# Altium PCB WX0.000.863.PcbDoc (part 3 of 4)
Units mil, origin at the board's own origin, x right, y up, seen from the top; angles counter-clockwise.
Board outline 6000 x 4000 mil, 2 copper layers (Top Layer, Bottom Layer); 210 components, 152 nets, 629 pads, 401 vias.
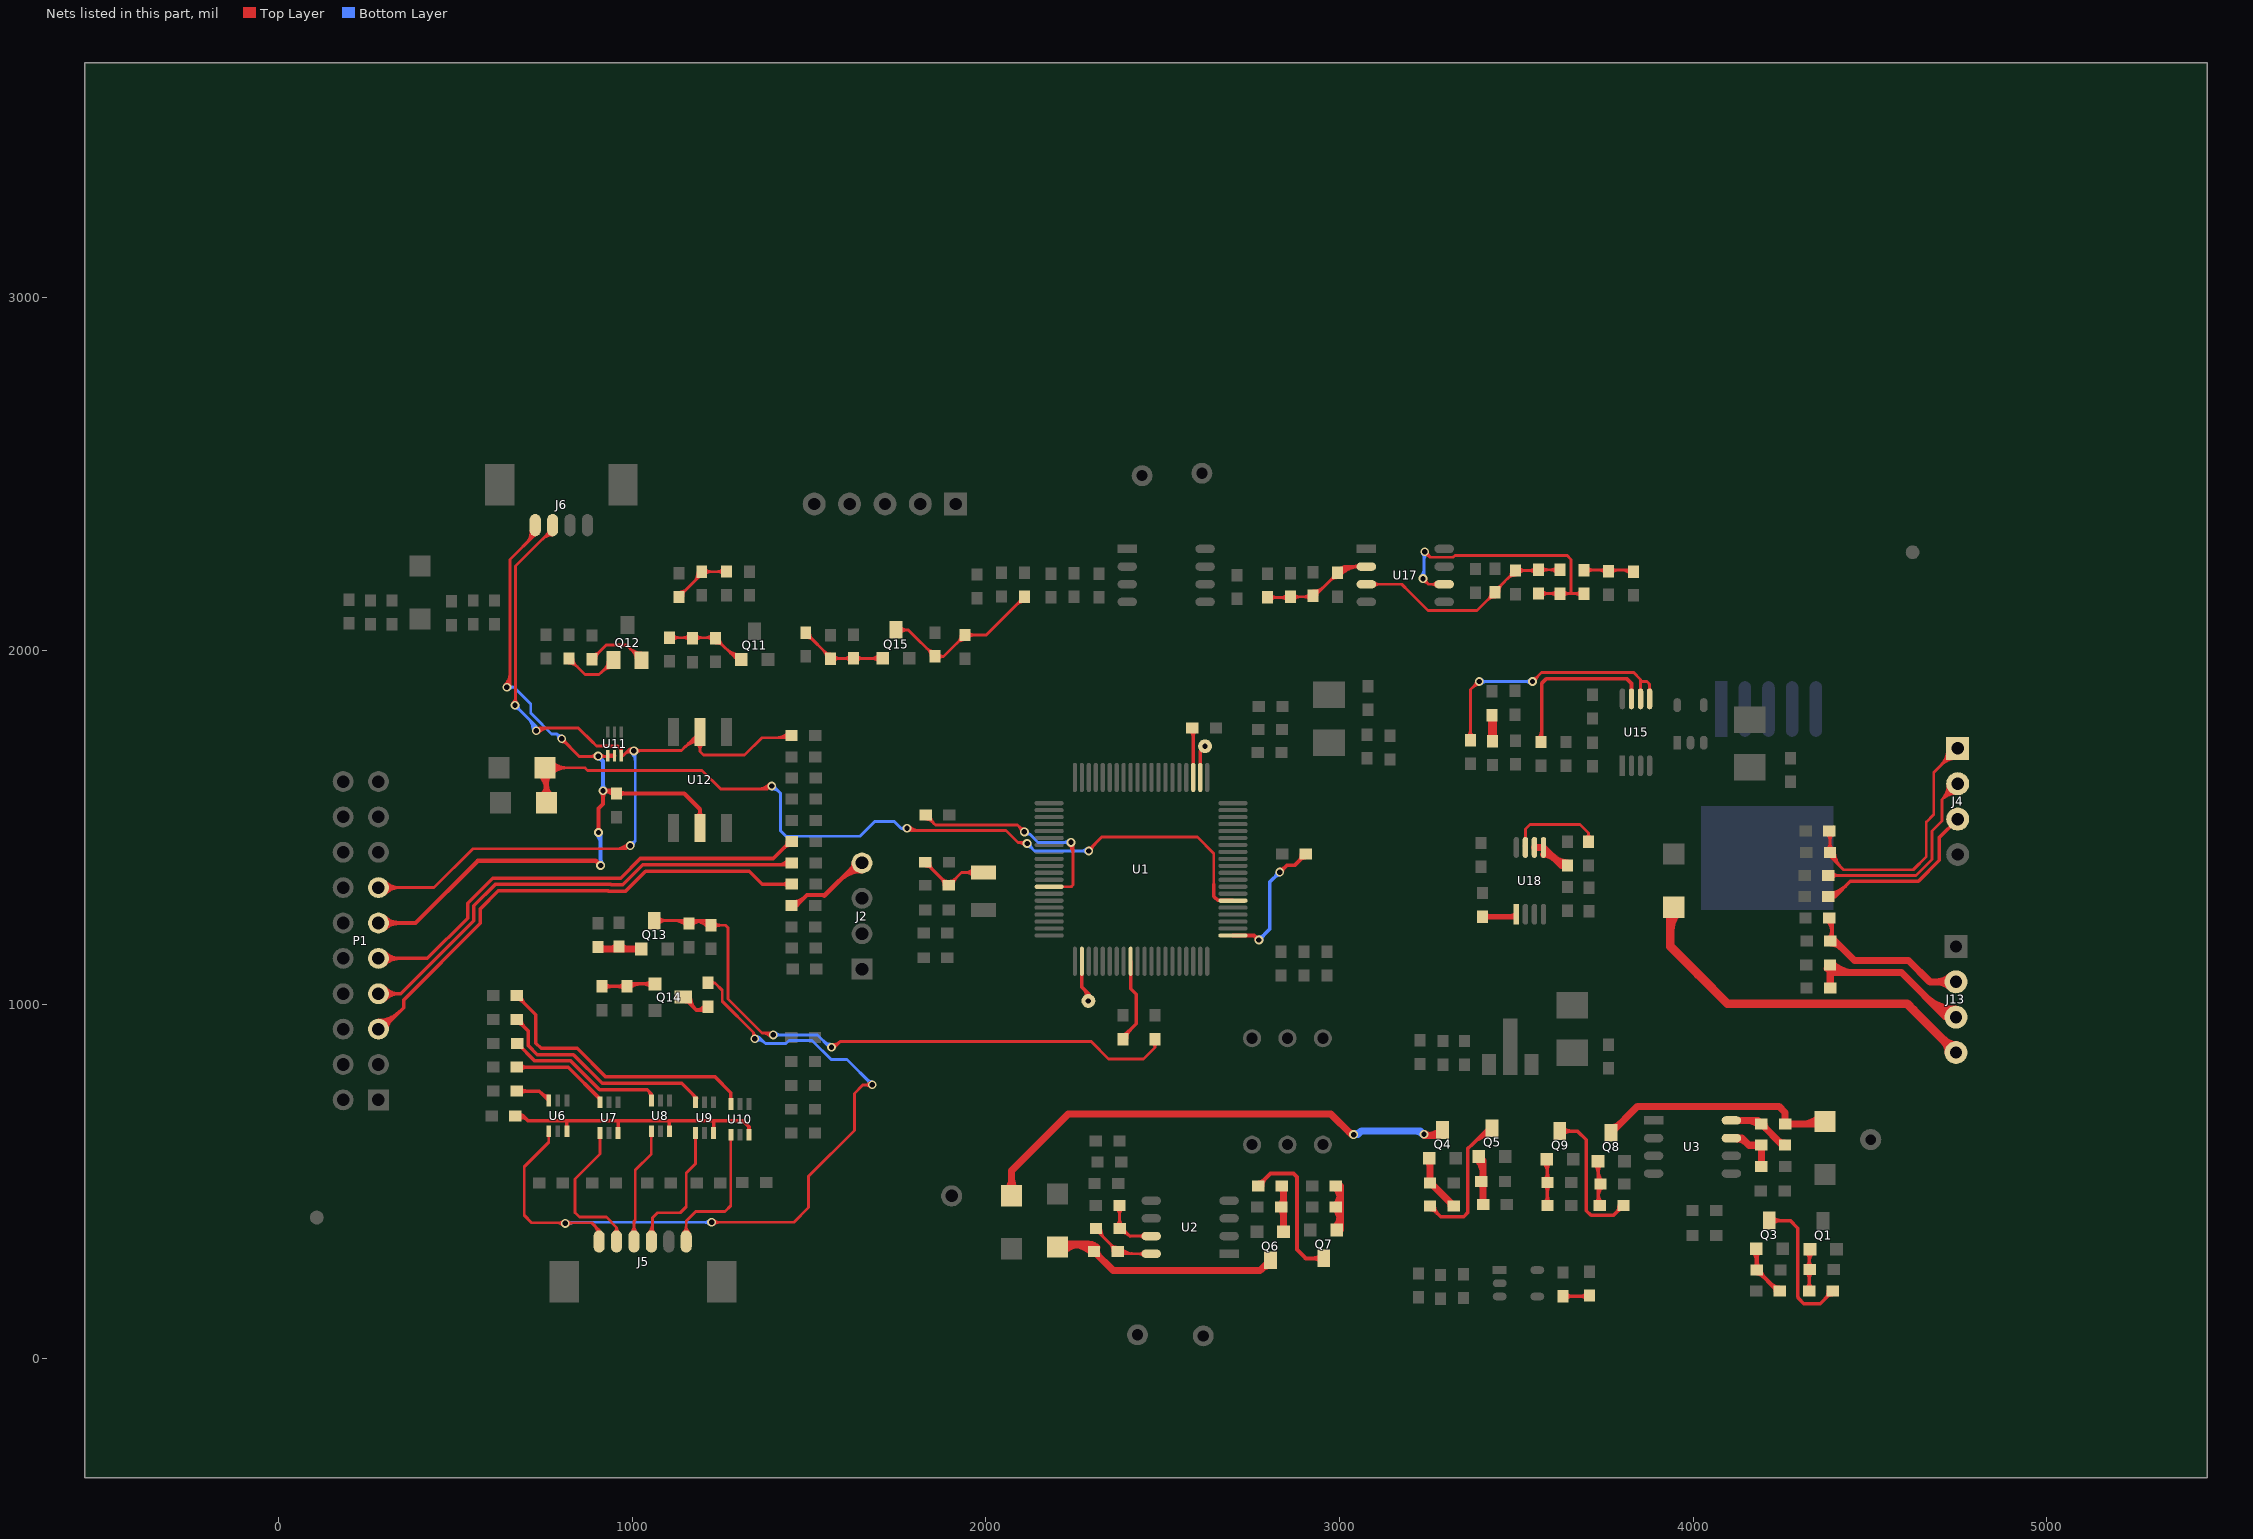
[diagram p3: the nets of this part, all layers, seen from the top]

## Via types
v1: diameter 25, hole 15, Top Layer to Bottom Layer, tented both sides, 401 vias

## Nets (pads, with @x,y where several pads share a name; then routed paths per layer and width w, separated by ;. In a path a pad name is that pad's centre, name@x,y a point inside that pad or via, vN(x,y) a via of type N, cw(c..) or ccw(c..) an arc to the next point about the centre after c; other vN are vias at no path point) (continued)
MOTO_INT: D1.1 D2.1 U1.46 | length 3114.1
  Top Layer w8: D1.1@754,1669 866.9,1669 874,1661.9 1197.44,1661.9 1250.54,1608.8 1382.8,1608.8 1394,1620 1394.81,1619.19 v1(1394.81,1617.81) ; D1.1@766.73,1656.27 cw(c797.46,1625.54) 797.46,1669 cw(c797.46,1712.46) D1.1@766.73,1681.73 ; D1.1@772.38,1650.62 cw(c816.77,1606.23) 816.77,1669 cw(c816.77,1731.77) D1.1@772.38,1687.38 ; 1352.54,1608.8 ccw(c1352.54,1660.07) v1@1388.8,1623.82 ; 1371.86,1608.8 ccw(c1371.86,1640.76) v1@1394.45,1618.16 ; v1(1777,1498) 1783.2,1491.8 2057.2,1491.8 2091,1458 ; v1@1777.35,1498.35 ccw(c1793.18,1514.18) 1793.18,1491.8 ; v1@1783.01,1504.01 ccw(c1812.49,1533.49) 1812.49,1491.8 ; 2103.72,1458 ccw(c2103.72,1468.28) v1@2110.99,1461.01 ; v1@2110.71,1449.28 ccw(c2091,1431.36) 2091,1458 ; v1(2117,1455) 2117,1456 2115,1458 2091,1458 ; v1(2291,1434) 2291,1436 2328,1473 2598.6,1473 2644.69,1426.91 2644.69,1340 ; v1@2291,1442.5 ccw(c2291,1458.19) 2302.1,1447.1 ; v1@2299.5,1434 cw(c2324.85,1434) 2306.92,1451.92
  Top Layer w10: 2644.69,1340 2644.69,1305.35 2655.65,1294.4 2697.85,1294.4 U1.46@2698.83,1293.42 ; 2650.29,1299.75 ccw(c2663.39,1312.85) U1.46@2663.39,1294.32
  Top Layer w12: D1.1@737.03,1652.03 cw(c686.4,1601.4) 758,1601.4 ; D2.1@741.03,1586.97 ccw(c700.06,1627.94) 758,1627.94 ccw(c815.94,1627.94) D2.1@774.97,1586.97 ; D1.1@745.51,1660.51 cw(c715.37,1630.37) 758,1630.37 ; D1.1@754,1669 758,1665 D2.1@758,1570 ; 758,1620.72 cw(c802.28,1620.72) D1.1@770.97,1652.03
  Bottom Layer w8: v1@1394.81,1609.31 cw(c1394.81,1578.2) 1416.8,1600.2 ; v1(1394.81,1617.81) 1396,1619 1398,1619 1419.3,1597.7 1419.3,1491.04 1434.74,1475.6 1644.26,1475.6 1685.96,1517.3 1741.07,1517.3 1760.37,1498 ; v1@1403.31,1617.81 ccw(c1413.24,1617.81) 1406.22,1610.78 ; v1@1770.11,1493.02 ccw(c1760.37,1485.97) 1760.37,1498 ; v1@1770.11,1502.98 cw(c1760.37,1510.03) 1760.37,1498 ; v1(1777,1498) 1760.37,1498 ; v1@2117,1446.5 cw(c2117,1425.98) 2131.51,1440.49 cw(c2146.02,1455) v1@2125.5,1455 ; v1@2284.99,1427.99 ccw(c2270.48,1413.48) 2270.48,1434 ccw(c2270.48,1454.52) v1@2284.99,1440.01 ; v1(2291,1434) 2138,1434 v1@2118.5,1453.5 ; v1@2118.5,1453.5 2117,1452 v1(2117,1455) v1@2118.5,1453.5
NetC3_1: C3.1 R34.1 U2.7 | length 340.5
  Top Layer w8: R34.1@2369.85,423.87 cw(c2350.22,404.24) 2377.98,404.24 cw(c2405.75,404.24) R34.1@2386.12,423.87 ; C3.1@2370.34,375.13 ccw(c2351.9,393.58) 2377.98,393.58 ; 2377.98,395.95 ccw(c2407.42,395.95) C3.1@2386.61,375.13 ; R34.1@2377.98,432 2377.98,367 2385,367 2407,345 U2.7@2467.98,345 ; C3.1@2380.48,355.5 cw(c2380.48,316.81) 2407.83,344.17 ; C3.1@2380.48,363.5 cw(c2380.48,344.13) C3.1@2394.17,357.83 ; C3.1@2391.98,367 ccw(c2408.82,367) 2396.91,355.09 ; U2.7@2446.77,339.34 ccw(c2433.11,325.69) 2433.11,345 ccw(c2433.11,364.31) U2.7@2446.77,350.66
NetC3_2: C3.2 R41.1 U2.8 | length 389.2
  Top Layer w8: C3.2@2310.98,367 2310.98,364 R41.1@2372.98,302 2379.98,295 U2.8@2467.98,295 ; C3.2@2313.48,355.5 cw(c2313.48,340.99) 2323.73,351.25 ; C3.2@2316.98,367 ccw(c2338.68,367) C3.2@2323.33,351.65 ; C3.2@2324.98,367 ccw(c2366,367) 2336.99,337.99 ; 2349.94,325.05 cw(c2326.89,302) R41.1@2359.48,302 ; 2354.77,320.22 ccw(c2370.98,336.43) R41.1@2370.98,313.5 ; R41.1@2377.46,304.47 ccw(c2400.33,327.35) 2400.33,295 ; R41.1@2383.12,310.13 ccw(c2419.65,346.66) 2419.65,295 ; U2.8@2446.77,289.34 ccw(c2433.11,275.69) 2433.11,295 ccw(c2433.11,314.31) U2.8@2446.77,300.66
NetC5_2: C5.2 R43.1 Y1.2 | length 397.3
  Top Layer w8: R43.1@1828.98,1402 1893.98,1337 C5.2@1895.49,1337 1931.79,1373.3 Y1.2@1993.98,1373.3 ; R43.1@1830.98,1390.5 cw(c1830.98,1367.57) 1847.2,1383.78 ; R43.1@1842.48,1402 ccw(c1875.08,1402) 1852.03,1378.95 ; 1873.51,1357.47 cw(c1853.04,1337) C5.2@1881.99,1337 ; 1874.7,1356.28 ccw(c1893.49,1375.08) C5.2@1893.49,1348.5 ; C5.2@1897.49,1348.5 ccw(c1897.49,1371.43) 1913.71,1355.22 ; C5.2@1908.99,1337 cw(c1941.59,1337) 1918.54,1360.05 ; Y1.2@1967.15,1362.21 ccw(c1940.37,1335.43) 1940.37,1373.3 ccw(c1940.37,1411.17) Y1.2@1967.15,1384.39
NetC9_1: C9.1 R49.1 U3.7 | length 207.3
  Top Layer w20: U3.7@4107.98,622 4137.98,622 4157.98,602 4192.98,602 R49.1@4192.98,542 ; U3.7@4123.54,620 cw(c4123.54,580.31) 4151.61,608.37 ; U3.7@4124.12,620.08 cw(c4130.23,599.8) 4145.2,614.78
NetC9_2: C9.2 R52.1 U3.8 | length 251.4
  Top Layer w20: U3.8@4107.98,672 4182.98,672 R52.1@4192.98,662 4252.98,602 C9.2@4259.98,602 ; 4153.56,672 cw(c4153.56,624.58) R52.1@4187.1,658.11 ; R52.1@4200.48,662 ccw(c4218.59,662) R52.1@4205.79,649.2 ; 4240.41,614.58 ccw(c4257.49,631.66) C9.2@4257.49,607.5
NetC21_2: C21.2 Q13.B R1.1 | length 223.1
  Top Layer w20: C21.2@903,1162.49 908.49,1157 Q13.B@1025.98,1157 ; C21.2@906.89,1164.38 ccw(c924.71,1182.2) 924.71,1157 ; 937.65,1157 ccw(c937.65,1187.35) R1.1@959.11,1165.89 ; R1.1@966.89,1165.89 ccw(c988.35,1187.35) 988.35,1157 ; Q13.B@1020.33,1151.34 ccw(c1006.67,1137.69) 1006.67,1157 ccw(c1006.67,1176.31) Q13.B@1020.33,1162.66
NetC32_2: C32.2 J13.2 R66.1 | length 676.1
  Top Layer w10: C32.2@4379.08,1236.58 cw(c4346.67,1204.17) 4392.51,1204.17 ; R66.1@4382.58,1186.42 ccw(c4358.59,1210.41) 4392.51,1210.41 ; C32.2@4386.16,1243.65 cw(c4370.82,1228.31) 4392.51,1228.31 ; R66.1@4392.51,1187.49 C32.2@4392.51,1252.49 ; 4392.51,1198.29 ccw(c4409.29,1198.29) R66.1@4397.42,1186.42
  Top Layer w20: R66.1@4390,1173.5 cw(c4390,1133.67) 4418.17,1161.83 ; R66.1@4392.51,1187.49 4456,1124 4609,1124 4669,1064 J13.2@4743,1064 ; J13.2@4727.09,1048.09 ccw(c4688.68,1009.68) 4688.68,1064 ccw(c4688.68,1118.32) J13.2@4727.09,1079.91
NetC33_1: C33.1 J13.3 R68.1 | length 725.1
  Top Layer w8: C33.1@4387,1047.49 C33.1@4387.49,1047
  Top Layer w20: R68.1@4378.75,1101.75 ccw(c4407.11,1130.11) 4407.11,1090 ; R68.1@4387,1112 4387.49,1111.51 C33.1@4387.49,1047 ; 4390.49,1090 4589,1090 4715,964 J13.3@4743,964 ; R68.1@4392.89,1115.89 ccw(c4455.39,1178.39) 4455.39,1090 ; 4656.79,1022.21 ccw(c4743,1108.42) J13.3@4743,986.5 ; 4690.93,988.07 ccw(c4743,1040.13) J13.3@4743,966.5
NetC36_2: C36.2 R70.1 R87.2 | length 358.3
  Top Layer w8: R70.1@1132,2152 1197,2217 C36.2@1197,2223.51 1266.51,2223.51 R87.2@1267,2224 ; R70.1@1132,2165.5 ccw(c1132,2198.09) 1155.05,2175.05 ; R70.1@1143.5,2154 cw(c1166.43,2154) 1150.22,2170.22 ; 1174.18,2194.18 ccw(c1146.85,2221.51) C36.2@1185.5,2221.51 ; 1185.07,2205.07 cw(c1197,2193.13) C36.2@1197,2210.01 ; C36.2@1187.84,2207.84 ccw(c1174.16,2221.51) C36.2@1193.5,2221.51 ; C36.2@1205.13,2215.38 cw(c1224.76,2195.75) 1224.76,2223.51 cw(c1224.76,2251.27) C36.2@1205.13,2231.64 ; 1238.05,2223.51 ccw(c1238.05,2252.95) R87.2@1258.87,2232.13 ; 1240.42,2223.51 cw(c1240.42,2197.42) R87.2@1258.87,2215.87
NetC38_1: C38.1 Q11.B R101.2 R103.1 | length 552
  Top Layer w8: R101.2@1106,2037 1234.49,2037 C38.1@1236,2035.49 1296.49,1975 Q11.B@1309,1975 ; R101.2@1114.13,2028.87 cw(c1133.76,2009.24) 1133.76,2037 cw(c1133.76,2064.76) R101.2@1114.13,2045.13 ; R103.1@1162.87,2028.87 ccw(c1143.24,2009.24) 1143.24,2037 ccw(c1143.24,2064.76) R103.1@1162.87,2045.13 ; R103.1@1179.13,2028.87 cw(c1198.76,2009.24) 1198.76,2037 cw(c1198.76,2064.76) R103.1@1179.13,2045.13 ; 1207.05,2037 ccw(c1207.05,2066.44) C38.1@1227.87,2045.62 ; 1209.42,2037 cw(c1209.42,2010.91) C38.1@1227.87,2029.36 ; C38.1@1236,2021.99 cw(c1236,1989.4) 1259.05,2012.45 ; C38.1@1247.5,2033.49 ccw(c1270.43,2033.49) 1254.22,2017.27 ; 1263.75,2007.74 ccw(c1309,2053) Q11.B@1309,1989 ; 1277.4,1994.09 ccw(c1309,2025.68) Q11.B@1309,1981 ; Q11.B@1291.06,1980.43 ccw(c1309,1998.37) Q11.B@1309,1973
NetC39_1: C39.1 Q15.C R105.1 R110.1 | length 728.3
  Top Layer w8: Q15.C@1746,2059 1781,2059 R105.1@1856,1984 1880.51,1984 ; Q15.C@1755.9,2049.1 cw(c1779.8,2025.2) 1779.8,2059 cw(c1779.8,2092.8) Q15.C@1755.9,2068.9 ; 1832.95,2007.05 ccw(c1856,2030.09) R105.1@1856,1997.5 ; 1837.78,2002.22 cw(c1821.57,1986) R105.1@1844.5,1986 ; R105.1@1864.84,1976.65 cw(c1880.51,1963.64) 1880.51,1984 ; R105.1@1864.84,1991.35 ccw(c1880.51,2004.36) 1880.51,1984 ; 1917.95,2021.45 cw(c1941,1998.4) C39.1@1941,2030.99 ; 1922.78,2026.27 ccw(c1906.57,2042.49) C39.1@1929.5,2042.49 ; C39.1@1949.13,2036.36 cw(c1968.76,2016.73) 1968.76,2044.49 cw(c1968.76,2072.25) C39.1@1949.13,2052.62 ; 2086.95,2129.95 cw(c2110,2106.91) R110.1@2110,2139.5 ; 2091.78,2134.78 ccw(c2075.57,2151) R110.1@2098.5,2151 ; R110.1@2110,2153 2001.49,2044.49 C39.1@1941,2044.49 1880.51,1984
NetC40_1: C40.1 Q15.B R106.2 R107.2 | length 523
  Top Layer w8: R106.2@1491,2037.5 cw(c1491,2004.91) 1514.05,2027.95 ; R106.2@1491,2051 1561,1981 R107.2@1561,1977 1562.51,1978.51 C40.1@1626,1978.51 1708.51,1978.51 Q15.B@1709,1979 ; R106.2@1502.5,2049 ccw(c1525.43,2049) 1509.22,2032.78 ; 1539.95,2002.05 cw(c1516.91,1979) R107.2@1549.5,1979 ; 1544.78,1997.22 ccw(c1561,2013.43) R107.2@1561,1990.5 ; R107.2@1569.13,1970.87 cw(c1587.58,1952.42) 1587.58,1978.51 ; R107.2@1569.13,1987.13 ccw(c1589.95,2007.95) 1589.95,1978.51 ; C40.1@1617.87,1970.38 ccw(c1598.24,1950.75) 1598.24,1978.51 ccw(c1598.24,2006.27) C40.1@1617.87,1986.64 ; C40.1@1634.13,1970.38 cw(c1653.76,1950.75) 1653.76,1978.51 cw(c1653.76,2006.27) C40.1@1634.13,1986.64 ; 1674.02,1978.51 ccw(c1674.02,2013.98) Q15.B@1699.1,1988.9 ; 1676.39,1978.51 cw(c1676.39,1946.39) Q15.B@1699.1,1969.1
NetC43_1: C43.1 R111.1 R112.1 R114.2 U17.2 | length 821.2
  Top Layer w8: R114.2@2796,2151 2859.49,2151 C43.1@2861,2152.51 R111.1@2925,2152.51 ; R114.2@2804.13,2142.87 cw(c2823.76,2123.24) 2823.76,2151 cw(c2823.76,2178.76) R114.2@2804.13,2159.13 ; 2832.05,2151 cw(c2832.05,2121.56) C43.1@2852.87,2142.38 ; 2834.42,2151 ccw(c2834.42,2177.09) C43.1@2852.87,2158.64 ; C43.1@2869.13,2144.38 cw(c2888.76,2124.75) 2888.76,2152.51 cw(c2888.76,2180.27) C43.1@2869.13,2160.64 ; 2896.05,2152.51 ccw(c2896.05,2181.95) R111.1@2916.87,2161.13 ; 2898.42,2152.51 cw(c2898.42,2126.42) R111.1@2916.87,2144.87 ; R111.1@2925,2155 2930,2155 R112.1@2995,2220 3014,2239 ; R111.1@2925,2160.5 ccw(c2925,2185.85) 2942.92,2167.92 ; R111.1@2925,2168.5 ccw(c2925,2213.16) 2956.58,2181.58 ; R111.1@2936.5,2157 cw(c2947.36,2157) R111.1@2939.68,2164.68 ; 2971.95,2196.95 cw(c2995,2173.91) R112.1@2995,2206.5 ; 2976.78,2201.78 ccw(c2960.57,2218) R112.1@2983.5,2218 ; R112.1@2991.82,2225.18 cw(c3025.18,2191.82) 3025.18,2239 ; R112.1@2996.76,2233.36 ccw(c2999.83,2253.17) 3014,2239 ; R112.1@2997.47,2219.53 cw(c3044.49,2172.51) 3044.49,2239 ; R112.1@3003.13,2213.87 cw(c3063.81,2153.19) U17.2@3063.81,2239 ; R112.1@3006.5,2222 cw(c3029.44,2222) 3013.22,2238.22 ; 3038.71,2239 cw(c3038.71,2216.27) U17.2@3054.78,2232.34 ; 3043.54,2239 ccw(c3043.54,2254.9) U17.2@3054.78,2243.66 ; U17.2@3076,2238 3075.42,2238 3074.42,2239 3014,2239
NetC45_1: C45.1 R116.2 R118.1 U17.6 | length 1131.6
  Top Layer w8: v1@3236,2195.5 cw(c3236,2174.98) 3250.51,2189.49 cw(c3265.02,2204) v1@3244.5,2204 ; v1(3236,2204) 3252,2188 3257,2188 U17.6@3296,2188 ; v1@3241,2271.5 cw(c3241,2250.98) 3255.51,2265.49 cw(c3270.02,2280) v1@3249.5,2280 ; v1(3241,2280) 3256.8,2264.2 3321.42,2264.2 3326.22,2269 3644,2269 3655,2258 3655,2161.51 ; U17.6@3274.78,2182.34 ccw(c3261.13,2168.69) 3261.13,2188 ccw(c3261.13,2207.31) U17.6@3274.78,2193.66 ; R118.1@3563,2162 3622.51,2162 C45.1@3623,2161.51 3655,2161.51 ; R118.1@3571.13,2153.87 cw(c3590.76,2134.24) 3590.76,2162 cw(c3590.76,2189.76) R118.1@3571.13,2170.13 ; 3594.05,2162 cw(c3594.05,2132.56) C45.1@3614.87,2153.38 ; 3596.42,2162 ccw(c3596.42,2188.09) C45.1@3614.87,2169.64 ; C45.1@3631.13,2153.38 cw(c3650.76,2133.75) 3650.76,2161.51 cw(c3650.76,2189.27) C45.1@3631.13,2169.64 ; 3662.01,2161.51 cw(c3662.01,2132.01) R116.2@3682.87,2152.87 ; 3664.47,2161.51 ccw(c3664.47,2187.53) R116.2@3682.87,2169.13 ; R116.2@3691,2161 3690.49,2161.51 3655,2161.51
  Bottom Layer w8: v1@3229.99,2210.01 ccw(c3208.24,2231.76) 3239,2231.76 ; v1@3234.99,2273.99 cw(c3225.31,2264.31) 3239,2264.31 ; v1(3236,2204) 3239,2207 3239,2280 v1(3241,2280) ; 3239,2217.28 ccw(c3249.28,2217.28) v1@3242.01,2210.01 ; 3239,2254.65 cw(c3266.35,2254.65) v1@3247.01,2273.99
NetC45_2: C45.2 R115.1 R117.1 R118.2 U17.3 | length 966.6
  Top Layer w8: U17.3@3076,2188 3176,2188 3198.12,2165.88 3202.2,2161.8 3250,2114 3389,2114 R115.1@3440,2165 R115.1@3435.71,2165 ; U17.3@3097.22,2182.34 cw(c3110.87,2168.69) 3110.87,2188 cw(c3110.87,2207.31) U17.3@3097.22,2193.66 ; 3416.95,2141.95 cw(c3440,2118.91) R115.1@3440,2151.5 ; 3421.78,2146.78 ccw(c3405.57,2163) R115.1@3428.5,2163 ; R115.1@3438,2167 R117.1@3498,2227 3561,2227 R118.2@3563,2229 3622.51,2229 C45.2@3623,2228.51 ; R115.1@3440,2178.5 ccw(c3440,2201.43) 3456.22,2185.22 ; R115.1@3451.5,2167 cw(c3484.09,2167) 3461.05,2190.05 ; 3474.95,2203.95 cw(c3498,2180.91) R117.1@3498,2213.5 ; 3479.78,2208.78 ccw(c3463.57,2225) R117.1@3486.5,2225 ; R117.1@3506.13,2218.87 cw(c3525.76,2199.24) 3525.76,2227 cw(c3525.76,2254.76) R117.1@3506.13,2235.13 ; R118.2@3554.87,2218.87 ccw(c3535.24,2199.24) 3535.24,2227 ccw(c3535.24,2254.76) R118.2@3554.87,2235.13 ; R118.2@3571.13,2220.87 cw(c3590.76,2201.24) 3590.76,2229 cw(c3590.76,2256.76) R118.2@3571.13,2237.13 ; 3594.05,2229 cw(c3594.05,2199.56) C45.2@3614.87,2220.38 ; 3596.42,2229 ccw(c3596.42,2255.09) C45.2@3614.87,2236.64
NetC46_1: C46.1 R113.2 R116.1 | length 316.3
  Top Layer w8: R116.1@3691,2228 3826.49,2228 C46.1@3831,2223.49 ; R116.1@3699.13,2219.87 cw(c3718.76,2200.24) 3718.76,2228 cw(c3718.76,2255.76) R116.1@3699.13,2236.13 ; 3730.82,2228 cw(c3730.82,2196.82) R113.2@3752.87,2218.87 ; 3735.65,2228 ccw(c3735.65,2252.35) R113.2@3752.87,2235.13 ; R113.2@3769.13,2218.87 cw(c3791.18,2196.82) 3791.18,2228 ; R113.2@3769.13,2235.13 ccw(c3786.35,2252.35) 3786.35,2228 ; 3797.18,2228 cw(c3797.18,2191.67) C46.1@3822.87,2217.36 ; 3809.29,2228 ccw(c3809.29,2247.2) C46.1@3822.87,2233.62
NetF1_1: F1.1 J13.4 | length 1179.1
  Top Layer w25: 3935,1208.61 cw(c4011.39,1208.61) F1.1@3957.37,1262.63 ; F1.1@3935,1275 3935,1164 4014,1085 4097,1002 4605,1002 4623,984 J13.4@4743,864 ; J13.4@4723,864 ccw(c4674.72,864) 4708.86,898.14 ccw(c4743,932.28) J13.4@4743,884
NetJ2_4: J2.4 R45.2 | length 450.3
  Top Layer w12: R45.2@1450.78,1280 1465.26,1280 1494.56,1309.3 1541,1309.3 1543.15,1307.15 1629,1393 J2.4@1657,1393 ; R45.2@1452.78,1276.77 ccw(c1452.78,1299.12) 1468.58,1283.32 ; R45.2@1452.78,1288.77 ccw(c1452.78,1340.09) 1489.07,1303.8 ; 1585.94,1349.94 cw(c1650,1285.87) J2.4@1650,1376.47 ; 1606.42,1370.42 cw(c1650,1326.84) J2.4@1650,1388.47 ; 1619.74,1383.74 ccw(c1603.47,1400) J2.4@1626.47,1400
NetJ4_1: J4.1 R4.2 R5.1 | length 1068.7
  Top Layer w8: R4.2@4378.87,1438.13 ccw(c4359.24,1457.76) 4387,1457.76 ccw(c4414.76,1457.76) R4.2@4395.13,1438.13 ; R5.1@4378.87,1481.87 cw(c4359.24,1462.24) 4387,1462.24 cw(c4414.76,1462.24) R5.1@4395.13,1481.87 ; R5.1@4385,1490 4387,1488 R4.2@4387,1430 4387,1419 4425,1381 4622.2,1381 4659.2,1418 4659.2,1516.2 4680,1537 4680,1656 J4.1@4748,1724 ; R4.2@4392.5,1430 ccw(c4432.33,1430) 4404.17,1401.83 ; R4.2@4400.5,1430 ccw(c4459.65,1430) 4417.82,1388.18 ; J4.1@4719.5,1724 cw(c4650.69,1724) 4699.35,1675.35 cw(c4748,1626.69) J4.1@4748,1695.5 ; J4.1@4727.5,1724 cw(c4678.01,1724) 4713,1689 cw(c4748,1654.01) J4.1@4748,1703.5
NetJ4_2: J4.2 R76.2 | length 759.8
  Top Layer w8: R76.2@4382,1365 4630,1365 4675,1410 4675,1490 4703.7,1518.7 4703.7,1579.7 ; R76.2@4392.13,1356.87 cw(c4411.76,1337.24) 4411.76,1365 cw(c4411.76,1392.76) R76.2@4392.13,1373.13 ; J4.2@4719.57,1622.05 cw(c4665.09,1618.31) 4703.7,1579.7 ; J4.2@4727.55,1622.6 cw(c4688.37,1619.91) 4716.14,1592.14 cw(c4743.91,1564.37) J4.2@4746.6,1603.55 ; J4.2@4746.05,1595.57 ccw(c4742.31,1541.09) 4703.7,1579.7 ; J4.2@4748,1624 4703.7,1579.7
NetJ4_3: J4.3 R77.2 | length 627.1
  Top Layer w10: R77.2@4382,1305 4401,1305 ; R77.2@4384,1305.5 ccw(c4384,1347.75) 4413.87,1317.87 ; R77.2@4384,1315.5 ccw(c4384,1381.89) 4430.95,1334.95 ; R77.2@4393.39,1300.3 cw(c4401,1296.49) 4401,1305 ; R77.2@4393.39,1309.7 ccw(c4401,1313.51) 4401,1305 ; J4.3@4728,1504 J4.3@4748,1524 4696,1472 4696,1407.24 4636.96,1348.2 4444.2,1348.2 4401,1305
NetJ5_1: J5.1 R37.2 U6.4 | length 2753
  Top Layer w8: U6.4@762.37,629.81 cw(c757.43,624.87) 764.41,624.87 cw(c771.39,624.87) U6.4@766.45,629.81 ; U6.4@764.41,641.69 764.41,610.58 695,541.17 695,404 716,383 v1@811,383 ; 785.65,383 cw(c785.65,355.65) v1@804.99,374.99 ; 795.31,383 ccw(c795.31,396.69) v1@804.99,387.01 ; v1(811,381) v1@811,383 ; v1@817.01,374.99 cw(c836.35,355.65) 836.35,383 ; v1@817.01,387.01 ccw(c826.69,396.69) 826.69,383 ; 890.67,378.33 cw(c860.25,347.92) J5.1@903.22,345.92 ; 893.96,375.04 886,383 ; J5.1@903.25,356.9 ccw(c901.54,362.04) 906.96,362.04 ; 903.47,365.53 cw(c884.73,346.78) J5.1@911.21,345.55 ; J5.1@906.96,330 906.96,362.04 ; J5.1@910.67,356.9 cw(c912.38,362.04) 906.96,362.04 ; R37.2@1214,1061 1234,1061 ; R37.2@1223.94,1055.22 cw(c1234,1049.36) 1234,1061 ; R37.2@1223.94,1066.78 ccw(c1234,1072.64) 1234,1061 ; v1(1225,384) 1457,384 1499,426 1499,514.17 1628.4,643.57 1628.4,748.4 1652,772 1679,772 v1(1679,773) ; v1@1231.01,377.99 cw(c1245.52,363.48) 1245.52,384 cw(c1245.52,404.52) v1@1231.01,390.01 ; v1(1347,903) 1343,907 1343,921.04 ; v1@1349.99,910.96 cw(c1353.77,921.04) 1343,921.04 ; 1656.07,772 ccw(c1656.07,795.93) v1@1672.99,779.01 ; 1660.89,772 cw(c1660.89,754.89) v1@1672.99,766.99 ; v1@811,383 886,383 ; 886,383 906.96,362.04 ; 1234,1061 1255,1040 1255,1009.04 1343,921.04
  Bottom Layer w8: v1(811,381) 814,384 v1(1225,384) ; v1@817.01,374.99 cw(c838.76,353.24) 838.76,384 ; v1@817.01,387.01 ccw(c824.28,394.28) 824.28,384 ; v1@1218.99,377.99 ccw(c1204.48,363.48) 1204.48,384 ccw(c1204.48,404.52) v1@1218.99,390.01 ; v1@1346.29,910.47 cw(c1347.99,892.53) 1360.73,905.27 ; v1(1347,903) 1363,903 ; v1@1347.05,902.5 cw(c1350.06,870.56) 1372.75,893.25 ; v1@1347.3,902.6 cw(c1355.27,892.19) 1364.54,901.46 ; v1@1352.16,896.25 cw(c1360.87,884.87) 1371,895 ; v1@1354.04,898.24 cw(c1363,892.19) 1363,903 ; v1@1354.04,907.76 ccw(c1363,913.81) 1363,903 ; v1@1670.5,773 ccw(c1649.98,773) 1664.49,787.51 ccw(c1679,802.02) v1@1679,781.5 ; v1(1679,773) 1608,844 1563,844 1509,898 1444,898 1435.22,889.22 1376.78,889.22 1363,903
NetJ5_2: J5.2 U7.4 | length 505.3
  Top Layer w8: 838.69,426 838.69,457 ; U7.4@907.37,624.81 cw(c902.43,619.87) 909.41,619.87 cw(c916.39,619.87) U7.4@911.45,624.81 ; U7.4@909.41,636.69 909.41,577.58 838.69,506.87 838.69,457 ; J5.2@948.95,355.01 ccw(c937.38,369.82) 956.17,369.82 ccw(c974.97,369.82) J5.2@963.4,355.01 ; J5.2@956.17,330 956.17,369.83 927.2,398.8 851.2,398.8 838.69,411.31 838.69,457
NetJ5_3: J5.3 U8.4 | length 417.5
  Top Layer w8: J5.3@997.08,354.06 ccw(c977.03,374.11) 1005.39,374.11 ccw(c1033.75,374.11) J5.3@1013.69,354.06 ; J5.3@1005.39,330 1005.39,387.39 1009,391 1009,445 ; 1009,415 1009,445 ; U8.4@1052.37,629.81 cw(c1047.43,624.87) 1054.41,624.87 cw(c1061.39,624.87) U8.4@1056.45,629.81 ; U8.4@1054.41,641.69 1054.41,577.58 1009,532.17 1009,486 1009,445
NetJ5_4: J5.4 U9.4 | length 467.6
  Top Layer w8: J5.4@1046.29,354.06 ccw(c1018.03,382.32) 1058,382.32 ; J5.4@1051.95,348.4 ccw(c1037.34,363) 1058,363 ; J5.4@1054.6,330 1058,333.4 1058,397 1072,411 1136,411 1153.21,428.21 1153.21,523.55 1179.41,549.75 U9.4@1179.41,636.69 ; 1058,365.9 ccw(c1074.75,365.9) J5.4@1062.91,354.06 ; U9.4@1177.37,624.81 cw(c1172.43,619.87) 1179.41,619.87 cw(c1186.39,619.87) U9.4@1181.45,624.81
NetJ5_6: J5.6 U10.4 | length 454.3
  Top Layer w8: J5.6@1144.72,354.06 ccw(c1124.66,374.11) 1153.03,374.11 ccw(c1181.39,374.11) J5.6@1161.33,354.06 ; J5.6@1153.03,330 1153.03,388.03 1180,415 1263,415 1278.81,430.81 1278.81,516.2 1278.81,631.09 U10.4@1279.41,631.69 ; 1278.81,613.42 cw(c1287.84,613.42) U10.4@1281.45,619.81
NetQ1_G: Q1.G R3.1 R7.2 | length 287.6
  Top Layer w10: R7.2@4320.58,197.42 ccw(c4302.65,215.35) 4328,215.35 ccw(c4353.35,215.35) R7.2@4335.42,197.42 ; R3.1@4320.58,242.58 cw(c4302.65,224.65) 4328,224.65 cw(c4353.35,224.65) R3.1@4335.42,242.58 ; R3.1@4320.58,257.42 ccw(c4302.65,275.35) 4328,275.35 ccw(c4353.35,275.35) R3.1@4335.42,257.42 ; Q1.G@4320.79,298.81 cw(c4303.39,281.41) 4328,281.41 ; R7.2@4328,190 4328,306.02 Q1.G@4329.98,308 ; 4328,271.82 cw(c4366.16,271.82) Q1.G@4339.18,298.81
NetQ3_B: Q3.B R9.1 R14.1 | length 303.9
  Top Layer w12: Q3.B@4169.5,300.51 cw(c4144.19,275.2) 4179.98,275.2 ; R14.1@4173.27,255.72 ccw(c4157.05,271.93) 4179.98,271.93 ccw(c4202.92,271.93) R14.1@4186.7,255.72 ; Q3.B@4177.98,309 4179.98,307 R14.1@4179.98,249 4238.98,190 R9.1@4245,190 ; 4179.98,284.86 cw(c4202.13,284.86) Q3.B@4186.47,300.51 ; R14.1@4181.98,239.5 cw(c4181.98,221.39) R14.1@4194.79,234.2 ; R14.1@4191.48,249 ccw(c4219.25,249) 4199.62,229.37 ; 4219.93,209.06 ccw(c4243,232.13) R9.1@4243,199.5 ; R9.1@4229.62,199.36 cw(c4220.26,190) R9.1@4233.5,190
NetQ3_C: Q3.C R7.1 | length 496.3
  Top Layer w10: Q3.C@4214.98,389 4274,389 4296,367 4296,173 4297.7,171.3 4297.7,169.2 4312.9,154 4359,154 R7.1@4395,190 ; Q3.C@4224.18,379.81 cw(c4246.37,357.62) 4246.37,389 cw(c4246.37,420.38) Q3.C@4224.18,398.19 ; 4373.66,168.66 ccw(c4352.32,190) R7.1@4382.5,190 ; 4378.49,173.49 cw(c4393,158.98) R7.1@4393,179.5
NetQ4_D: Q4.D R94.2 | length 1594
  Top Layer w20: R94.2@2058.86,473.14 ccw(c2024.72,507.28) 2073,507.28 ccw(c2121.28,507.28) R94.2@2087.14,473.14 ; R94.2@2073,459 2073,530 2232.7,689.7 2976.3,689.7 3034,632 v1(3040,632) ; 3025.49,640.51 ccw(c3040,655.02) v1@3040,634.5 ; v1(3239,633) 3239,630 3275.98,630 Q4.D@3290.98,645 ; v1@3240.77,634.77 ccw(c3252.28,646.28) 3252.28,630 ; 3252.36,630 ccw(c3252.36,676.63) Q4.D@3285.33,643.66
  Bottom Layer w20: v1(3040,632) 3052,632 3062.5,642.5 ; v1@3040.24,634.49 ccw(c3042.86,662.14) 3062.5,642.5 ; 3210.03,642.5 cw(c3210.03,604.03) v1@3237.23,631.23 ; v1(3239,633) 3239,632 3228.5,642.5 3199,642.5 3062.5,642.5
NetQ4_G: Q4.G R17.1 R18.2 | length 199.5
  Top Layer w20: Q4.G@3248.33,559.34 cw(c3229.84,540.86) 3255.98,540.86 ; Q4.G@3253.98,565 3255.98,563 R17.1@3255.98,495 3257.98,495 R18.2@3322.98,430 ; R18.2@3310.18,442.8 cw(c3297.38,430) R18.2@3315.48,430
NetQ5_B: Q5.B R19.1 R20.1 | length 224.3
  Top Layer w20: Q5.B@3388.33,564.34 cw(c3345.7,521.72) 3405.98,521.72 ; Q5.B@3393.98,570 3405.98,558 R19.1@3405.98,435 ; R20.1@3399.1,496.11 cw(c3382.46,479.48) 3405.98,479.48 ; R20.1@3399.1,503.89 ccw(c3382.46,520.52) 3405.98,520.52
NetQ5_C: Q5.C R18.1 | length 521.7
  Top Layer w10: R18.1@3255.98,430 3285.98,400 3350.98,400 3363.18,412.2 3363.18,593.3 3370.68,600.8 3371.78,600.8 Q5.C@3420.98,650 ; R18.1@3257.98,419.5 cw(c3257.98,398.98) 3272.49,413.49 ; R18.1@3268.48,430 ccw(c3298.66,430) 3277.32,408.66 ; 3379.77,608.79 cw(c3430.98,557.57) Q5.C@3430.98,630 ; 3396.84,625.86 cw(c3430.98,591.72) Q5.C@3430.98,640
NetQ6_D: Q6.D R38.2 R41.2 | length 858
  Top Layer w20: R38.2@2197.98,322.19 2285.79,322.19 R41.2@2305.98,302 2360.28,247.7 2775.68,247.7 Q6.D@2804.98,277 ; R38.2@2217.14,299.86 cw(c2271.06,245.94) 2271.06,322.19 ; 2241.96,322.19 cw(c2241.96,239.97) R41.2@2300.1,298.11 ; 2290.24,322.19 cw(c2290.24,288.26) R41.2@2314.24,312.25 ; R41.2@2293.18,314.8 cw(c2280.38,302) R41.2@2298.48,302 ; R41.2@2313.48,302 ccw(c2331.59,302) R41.2@2318.79,289.2 ; 2779.38,251.39 cw(c2804.98,225.79) Q6.D@2804.98,262
NetQ6_G: Q6.G R32.1 R35.2 | length 228.6
  Top Layer w20: R32.1@2833.1,423.11 cw(c2811.64,401.65) 2841.98,401.65 ; R32.1@2833.1,430.89 ccw(c2811.64,452.35) 2841.98,452.35 ; R35.2@2835.1,483.11 cw(c2818.46,466.48) 2841.98,466.48 ; Q6.G@2836.33,362.66 ccw(c2822.67,376.31) 2841.98,376.31 ccw(c2861.3,376.31) Q6.G@2847.64,362.66 ; R35.2@2836.98,487 2841.98,482 Q6.G@2841.98,357
NetQ7_B: Q7.B R39.1 R44.1 | length 280.6
  Top Layer w20: Q7.B@2986.9,367.66 ccw(c2950.01,404.55) 3002.18,404.55 ; R44.1@2988.1,423.11 cw(c2954.08,389.1) 3002.18,389.1 ; R44.1@2988.1,430.89 ccw(c2954.08,464.9) 3002.18,464.9 ; R39.1@2988.1,483.11 cw(c2954.08,449.1) 3002.18,449.1 ; R39.1@2999.18,484 R39.1@3002.18,487 ; Q7.B@3002.18,362 R39.1@3002.18,484
NetQ7_C: Q7.C R35.1 | length 501.1
  Top Layer w12: R35.1@2769.98,487 2804.98,522 2869.98,522 2879.98,512 2879.98,307 2904.98,282 Q7.C@2955.56,282 ; R35.1@2771.98,496.5 ccw(c2771.98,514.61) R35.1@2784.79,501.8 ; R35.1@2781.48,487 cw(c2809.25,487) 2789.62,506.63 ; Q7.C@2947.07,273.51 ccw(c2926.59,253.03) 2926.59,282 ccw(c2926.59,310.97) Q7.C@2947.07,290.49
NetQ8_D: Q8.D R50.2 R52.2 | length 781.4
  Top Layer w20: Q8.D@3767.98,637 3842.98,712 ; Q8.D@3767.98,652 ccw(c3767.98,688.21) 3793.59,662.61 ; 3845.2,712 4242.98,712 4259.98,695 R52.2@4259.98,662 ; R52.2@4260.18,661.81 R52.2@4259.98,662 ; 4307.82,662 ccw(c4307.82,734.18) R50.2@4358.86,683.14 ; 4341.62,662 cw(c4341.62,637.62) R50.2@4358.86,654.86 ; R50.2@4373,669 4366,662 R52.2@4259.98,662
NetQ8_G: Q8.G R48.1 R51.2 | length 282.8
  Top Layer w10: Q8.G@3721.79,547.81 cw(c3699.6,525.62) 3730.98,525.62 cw(c3762.37,525.62) Q8.G@3740.18,547.81 ; R51.2@3726.56,439.42 ccw(c3715.88,450.11) 3730.98,450.11 ; 3730.98,454.58 cw(c3773.4,454.58) R48.1@3743.41,484.58 ; 3730.98,464.59 ccw(c3766.58,464.59) R51.2@3741.41,439.42 ; 3730.98,529.42 ccw(c3773.4,529.42) R48.1@3743.41,499.42 ; Q8.G@3730.98,557 3730.98,437 R51.2@3735.98,432
NetQ9_B: Q9.B R53.1 R54.1 | length 299.6
  Top Layer w10: Q9.B@3576.79,552.81 cw(c3549.77,525.79) 3587.98,525.79 ; R53.1@3580.56,439.42 ccw(c3562.64,457.35) 3587.98,457.35 ccw(c3613.33,457.35) R53.1@3595.41,439.42 ; R54.1@3580.56,489.58 cw(c3562.64,471.65) 3587.98,471.65 cw(c3613.33,471.65) R54.1@3595.41,489.58 ; R54.1@3580.56,504.42 ccw(c3562.64,522.35) 3587.98,522.35 ccw(c3613.33,522.35) R54.1@3595.41,504.42 ; Q9.B@3585.98,562 3587.98,560 R54.1@3587.98,497 R53.1@3587.98,432 ; 3587.98,535.44 cw(c3612.54,535.44) Q9.B@3595.18,552.81
NetQ9_C: Q9.C R51.1 | length 496.7
  Top Layer w10: Q9.C@3622.98,642 3672.98,642 3697.98,617 3697.98,417 3711.28,403.7 3774.68,403.7 R51.1@3802.98,432 ; Q9.C@3632.18,632.81 cw(c3654.37,610.62) 3654.37,642 cw(c3654.37,673.38) Q9.C@3632.18,651.19 ; 3781.65,410.66 ccw(c3760.31,432) R51.1@3790.48,432 ; 3786.47,415.49 cw(c3800.98,400.98) R51.1@3800.98,421.5
NetQ12_1: Q12.1 R100.2 | length 303.3
  Top Layer w8: R100.2@887,1976 927,2016 984,2016 Q12.1@1027,1973 ; R100.2@887,1989.5 ccw(c887,2022.09) 910.05,1999.05 ; R100.2@898.5,1978 cw(c921.43,1978) 905.22,1994.22 ; 991.15,2008.85 ccw(c1027,2044.7) Q12.1@1027,1994 ; 1003.22,1996.78 cw(c984.44,1978) Q12.1@1011,1978 ; 1004.81,1995.19 ccw(c1027,2017.38) Q12.1@1027,1986
NetQ12_2: Q12.2 R104.1 | length 290.1
  Top Layer w8: R104.1@822,1964.5 cw(c822,1931.91) 845.05,1954.95 ; R104.1@822,1978 867,1933 906.84,1933 Q12.2@947.64,1973.8 ; R104.1@833.5,1976 ccw(c856.43,1976) 840.22,1959.78 ; 911.79,1937.95 cw(c947.64,1902.1) Q12.2@947.64,1952.8 ; 923.86,1950.02 ccw(c905.08,1968.8) Q12.2@931.64,1968.8 ; 925.45,1951.61 cw(c947.64,1929.42) Q12.2@947.64,1960.8
NetQ13_C: Q13.C R36.1 R75.2 R88.2 | length 2277.8
  Top Layer w8: Q13.C@1062.98,1237 1210,1237 R36.1@1223,1224 1263.8,1224 1270.8,1217 1270.8,1015.59 1367.39,919 ; Q13.C@1072.88,1227.1 cw(c1096.78,1203.2) 1096.78,1237 cw(c1096.78,1270.8) Q13.C@1072.88,1246.9 ; 1118.74,1237 cw(c1118.74,1188.75) R75.2@1152.85,1222.87 ; 1138.05,1237 cw(c1138.05,1208.07) R75.2@1158.51,1228.53 ; R75.2@1163.46,1228.53 cw(c1183.92,1208.07) 1183.92,1237 ; R75.2@1168.68,1237 cw(c1168.68,1171.68) R36.1@1214.87,1217.87 ; R75.2@1169.12,1222.87 cw(c1203.23,1188.75) 1203.23,1237 ; 1187.99,1237 cw(c1187.99,1190.99) R36.1@1220.53,1223.53 ; 1207.31,1237 cw(c1207.31,1210.31) R36.1@1226.18,1229.18 ; R36.1@1231.13,1215.87 cw(c1250.76,1196.24) 1250.76,1224 cw(c1250.76,1251.76) R36.1@1231.13,1232.13 ; 1386.12,919 cw(c1386.12,901.67) v1@1398.64,913.65 ; v1@1392.86,908.12 ccw(c1367.39,883.74) 1367.39,919 ; v1(1399,914) 1399,919 1367.39,919 ; v1(1564,879) 1572,879 1588.4,895.4 ; v1@1564.06,879.5 ccw(c1566.01,894.73) 1576.87,883.87 ; v1@1565.08,887.43 ccw(c1568.62,915.18) 1588.4,895.4 ; 1686.4,895.4 1720,895.4 ; R88.2@2471.44,890.56 cw(c2462.71,878) 2478,878 ; R88.2@2478,902 2478,878 ; R88.2@2484.56,890.56 ccw(c2493.29,878) 2478,878 ; 1588.4,895.4 1720,895.4 ; 1720,895.4 2298.26,895.4 2347.46,846.2 2446.2,846.2 2478,878
  Bottom Layer w8: v1(1399,914) 1524,914 1559,879 v1(1564,879) ; v1@1405.01,907.99 cw(c1419.52,893.48) 1419.52,914 cw(c1419.52,934.52) v1@1405.01,920.01 ; 1540.95,897.05 ccw(c1564,920.09) v1@1564,887.5
NetQ14_B: Q14.B R58.1 R59.1 | length 315.2
  Top Layer w10: R58.1@915,1050.98 R59.1@985,1050.98 992,1057.98 Q14.B@1065,1057.98 ; R58.1@922.42,1043.56 cw(c940.35,1025.64) 940.35,1050.98 cw(c940.35,1076.33) R58.1@922.42,1058.41 ; R59.1@977.58,1043.56 ccw(c959.65,1025.64) 959.65,1050.98 ccw(c959.65,1076.33) R59.1@977.58,1058.41 ; R59.1@992.42,1045.56 cw(c1022.42,1015.56) 1022.42,1057.98 ; Q14.B@1055.81,1048.79 ccw(c1033.62,1026.6) 1033.62,1057.98 ccw(c1033.62,1089.37) Q14.B@1055.81,1067.18
NetQ14_C: Q14.C R37.1 | length 205.2
  Top Layer w10: Q14.C@1145,1020.98 1182,983.98 ; Q14.C@1152,1007.98 cw(c1152,993.5) Q14.C@1162.24,1003.74 ; Q14.C@1155,1020.94 ccw(c1178.18,1020.59) Q14.C@1161.79,1004.2 ; Q14.C@1165,1020.79 ccw(c1211.1,1020.09) 1178.5,987.49 ; R37.1@1199.28,983.98 ccw(c1199.28,1000.46) R37.1@1213.57,992.25 ; R37.1@1204.9,997.23 cw(c1182,1010.39) 1182,983.98 ; R37.1@1223,983.98 1182,983.98
NetR2_1: R2.1 U6.3 | length 166.8
  Top Layer w10: R2.1@674,755 737.72,755 U6.3@764.41,728.31 ; R2.1@683.42,747.58 cw(c701.35,729.65) 701.35,755 cw(c701.35,780.35) R2.1@683.42,762.42 ; 744.38,748.34 ccw(c764.41,768.36) U6.3@764.41,740.04 ; U6.3@761.45,731.26 ccw(c764.41,734.22) U6.3@764.41,730.04
NetR8_1: R8.1 U7.3 | length 321.8
  Top Layer w10: R8.1@674,822.5 819.5,822.5 909.41,732.59 U7.3@909.41,723.31 ; R8.1@683.42,815.08 cw(c701.35,797.15) 701.35,822.5 cw(c701.35,847.85) R8.1@683.42,829.92
NetR10_1: R10.1 R11.2 | length 155.5
  Top Layer w10: R11.2@3632,175 3705,175 R10.1@3707,177 ; R11.2@3639.42,167.58 cw(c3657.35,149.65) 3657.35,175 cw(c3657.35,200.35) R11.2@3639.42,182.42 ; R10.1@3699.58,167.58 ccw(c3681.65,149.65) 3681.65,175 ccw(c3681.65,200.35) R10.1@3699.58,182.42
NetR13_2: R13.2 U18.1 | length 147.3
  Top Layer w15: R13.2@3405,1248 3493,1248 U18.1@3500,1255 ; R13.2@3410.66,1242.34 cw(c3424.31,1228.69) 3424.31,1248 cw(c3424.31,1267.31) R13.2@3410.66,1253.66 ; 3482.67,1248 ccw(c3482.67,1272.33) U18.1@3499.87,1255.13
NetR15_1: R15.1 U1.63 | length 181.1
  Top Layer w10: R15.1@2578.56,1774.58 cw(c2559.1,1755.11) 2586.62,1755.11 ; R15.1@2583.98,1782 2586.62,1779.36 U1.63@2586.62,1641.84 ; 2586.62,1758.19 cw(c2609.79,1758.19) R15.1@2593.41,1774.58
NetR16_2: R16.2 U1.29 | length 293.7
  Top Layer w10: R16.2@2388,902 2388,908 2424.98,944.98 2424.98,1004 ; R16.2@2388,914.5 ccw(c2388,930.19) R16.2@2399.1,919.1 ; R16.2@2398.5,904 cw(c2433.51,904) 2408.75,928.75 ; U1.29@2409.46,1122.16 2409.46,1044.53 2424.98,1029 2424.98,1004 ; 2424.98,992 2424.98,1004
NetR26_1: R26.1 U9.3 | length 676.8
  Top Layer w10: R26.1@674,957.5 707,924.5 707,883.17 732.07,858.1 834.25,858.1 915.35,777 1140,777 U9.3@1182.39,734.61 ; R26.1@676,947 cw(c676,926.48) 690.51,940.99 ; R26.1@686.5,957.5 ccw(c716.68,957.5) 695.34,936.16 ; 1173.04,743.96 cw(c1162.24,733.15) U9.3@1177.52,733.15
NetR27_1: R27.1 U10.3 | length 838.2
  Top Layer w10: R27.1@674,1025 728,971 728,890.8 742.9,875.9 845.1,875.9 926,795 1235,795 1279.41,750.59 U10.3@1279.41,718.31 ; R27.1@676,1014.5 cw(c676,993.98) 690.51,1008.49 ; R27.1@686.5,1025 ccw(c716.68,1025) 695.34,1003.66
NetR30_1: R30.1 U8.3 | length 479.2
  Top Layer w10: R30.1@675,890 724.7,840.3 826.87,840.3 871.09,796.09 907.97,759.2 1042.8,759.2 1054.41,747.59 U8.3@1054.41,728.31 ; 1044.51,757.49 cw(c1025.17,738.15) U8.3@1052.52,738.15
NetR55_2: R55.2 R93.1 | length 74.8
  Top Layer w25: R55.2@3430.98,1818 3433,1815.98 R93.1@3433,1744
NetR57_2: R57.2 U18.7 | length 321.5
  Top Layer w8: U18.7@3522,1447.57 U18.7@3525.59,1443.98 3525.59,1495.59 3539,1509 3680,1509 3704,1485 ; U18.7@3522.99,1468.43 ccw(c3516.71,1474.7) 3525.59,1474.7 ccw(c3534.47,1474.7) U18.7@3528.19,1468.43 ; R57.2@3697.1,1471.2 ccw(c3686.75,1485) 3704,1485 ; R57.2@3704,1460 3704,1485 ; R57.2@3710.9,1471.2 cw(c3721.25,1485) 3704,1485
NetR78_1: R78.1 U1.41 | length 545.1
  Top Layer w10: U1.41@2697.85,1195.97 U1.41@2698.83,1194.99 2759.01,1194.99 v1(2772,1182) ; v1@2764.5,1182 ccw(c2746.39,1182) 2759.2,1194.8 ccw(c2772,1207.61) v1@2772,1189.5 ; v1(2831,1374) 2832,1374 2851,1393 2873,1393 R78.1@2905,1425 ; v1@2831,1381.5 ccw(c2831,1402.02) 2845.51,1387.51 ; v1@2838.5,1374 cw(c2854.19,1374) 2843.1,1385.1 ; 2883.66,1403.66 ccw(c2862.32,1425) R78.1@2892.5,1425 ; 2888.49,1408.49 cw(c2903,1393.98) R78.1@2903,1414.5
  Bottom Layer w10: v1(2772,1182) 2802.3,1212.3 2802.3,1327 2802.3,1345.3 v1(2831,1374) ; v1@2772,1189.5 ccw(c2772,1207.61) 2784.8,1194.8 ccw(c2797.61,1182) v1@2779.5,1182 ; v1@2823.5,1374 cw(c2805.39,1374) 2818.2,1361.2 cw(c2831,1348.39) v1@2831,1366.5
NetR82_1: R82.1 U1.13 | length 809.7
  Top Layer w8: R82.1@1830,1535 1857.4,1507.6 2089.4,1507.6 v1(2109,1488) ; R82.1@1832,1523.5 cw(c1832,1500.57) 1848.22,1516.78 ; R82.1@1843.5,1535 ccw(c1876.09,1535) 1853.05,1511.95 ; v1@2100.5,1488 ccw(c2079.98,1488) 2094.49,1502.51 ccw(c2109,1517.02) v1@2109,1496.5 ; U1.13@2179.14,1332.79 2241.79,1332.79 2247,1338 2247,1449 2238,1458 2240.48,1458 v1(2240.78,1458.3) ; v1@2234.77,1452.29 cw(c2205.24,1422.76) 2247,1422.76 ; v1@2240.43,1457.95 cw(c2224.56,1442.08) 2247,1442.08
  Bottom Layer w8: v1(2109,1488) 2116,1481 2125.37,1481 ; v1@2117.49,1488.46 ccw(c2125.36,1488.89) 2125.36,1481 ; v1@2234.77,1452.29 ccw(c2220.26,1437.78) 2220.26,1458.3 ccw(c2220.26,1478.82) v1@2234.77,1464.31 ; v1(2240.78,1458.3) 2148.07,1458.3 2125.37,1481
NetR83_2: R83.2 U18.5 U18.6 | length 198.9
  Top Layer w20: U18.6@3551.18,1443.98 U18.5@3576.77,1443.98 3577.02,1443.98 3628,1393 R83.2@3645,1393 ; U18.5@3576.77,1424.45 cw(c3576.77,1376.7) 3610.54,1410.46 ; 3603.18,1417.82 ccw(c3645,1459.65) R83.2@3645,1400.5
NetR85_2: R85.2 U15.7 | length 515
  Top Layer w10: R85.2@3562.58,1751.42 ccw(c3541.51,1772.49) 3571.3,1772.49 ; R85.2@3570,1742 3571.3,1743.3 3571.3,1907.3 3585.4,1921.4 3811.6,1921.4 3825.59,1907.41 U15.7@3825.59,1863.98 ; 3571.3,1766.21 ccw(c3592.21,1766.21) R85.2@3577.42,1751.42
NetR89_2: R89.2 U15.5 U15.6 | length 979.2
  Top Layer w8: R89.2@3361.87,1757.13 ccw(c3342.24,1776.76) 3370,1776.76 ccw(c3397.76,1776.76) R89.2@3378.13,1757.13 ; R89.2@3370,1747 3370,1890 3393,1913 v1(3395,1913) ; 3377.08,1897.08 cw(c3395,1879.15) v1@3395,1904.5 ; 3381.9,1901.9 ccw(c3370.81,1913) v1@3386.5,1913 ; v1(3546,1913) 3571.2,1938.2 3831.8,1938.2 3851.18,1918.82 3851.18,1913 ; v1@3546,1921.5 ccw(c3546,1942.02) 3560.51,1927.51 ccw(c3575.02,1913) v1@3554.5,1913 ; U15.6@3848.58,1888.43 ccw(c3842.3,1894.7) 3851.18,1894.7 ccw(c3860.06,1894.7) U15.6@3853.78,1888.43 ; U15.6@3851.18,1863.98 3851.18,1913 ; U15.5@3874.17,1888.43 ccw(c3867.89,1894.7) 3876.77,1894.7 ccw(c3885.65,1894.7) U15.5@3879.37,1888.43 ; U15.5@3876.77,1863.98 3876.77,1905.23 3869,1913 3851.18,1913
  Bottom Layer w8: v1(3395,1913) 3397,1915 3399,1913 v1(3546,1913) ; v1@3401.01,1906.99 cw(c3415.52,1892.48) 3415.52,1913 cw(c3415.52,1933.52) v1@3401.01,1919.01 ; v1@3539.99,1906.99 ccw(c3525.48,1892.48) 3525.48,1913 ccw(c3525.48,1933.52) v1@3539.99,1919.01
NetR95_1: R95.1 U6.6 U7.6 U8.6 U9.6 U10.6 | length 943.4
  Top Layer w10: R95.1@670,685 692,685 ; R95.1@672.08,684.51 cw(c677.8,650.66) 702.07,674.93 ; R95.1@672.3,684.6 cw(c682.24,671.47) 693.88,683.12 ; R95.1@678.34,676.63 cw(c689.23,662.24) 702,675 ; R95.1@680.64,679.04 cw(c692,671.2) 692,685 ; R95.1@680.64,690.96 ccw(c692,698.8) 692,685 ; U6.6@815.59,641.69 815.59,670.63 815,671.23 ; U7.6@960.59,636.69 960.59,670.82 961,671.23 ; U8.6@1105.59,641.69 1105.59,670.82 1106,671.23 ; 1132.23,671.23 1123,671.23 ; U9.6@1230.59,636.69 1230.59,669.63 1229,671.23 ; U10.6@1330.59,631.69 1330.59,654.41 1313.77,671.23 1229,671.23 ; 692,685 705.77,671.23 815,671.23 ; 815,671.23 961,671.23 ; 961,671.23 1106,671.23 ; 1106,671.23 1123,671.23 ; 1123,671.23 1229,671.23
NetS1_1: S1.1 U1.62 | length 122.3
  Top Layer w10: U1.62@2606.31,1641.84 2606.31,1716.31 v1(2620,1730) ; S1.1@2612.5,1730 cw(c2594.39,1730) 2607.2,1717.2 cw(c2620,1704.39) S1.1@2620,1722.5
NetS2_1: S2.1 U1.22 | length 232.1
  Top Layer w10: U1.22@2271.66,1122.16 2271.66,1049.34 2290,1031 ; 2274.48,1046.52 cw(c2246.38,1018.42) S2.1@2285.4,1010.89 ; S2.1@2284.7,1015.3 ccw(c2271.89,1028.11) 2290,1028.11 ccw(c2308.11,1028.11) S2.1@2295.3,1015.3 ; S2.1@2284.96,1023.79 ccw(c2282.33,1031) 2290,1031 ; 2287.8,1033.2 cw(c2268.71,1014.11) S2.1@2295.22,1008.99 ; v1(2290,1010) 2290,1031 ; S2.1@2295.04,1023.79 cw(c2297.67,1031) 2290,1031
P_5: P1.9 R80.1 | length 1520
  Top Layer w10: P1.9@283,1130.26 421.26,1130.26 535,1244 535,1286 606,1357 967.65,1357 1023.25,1412.6 1399.38,1412.6 R80.1@1451.78,1465 ; P1.9@293.27,1119.99 cw(c318.07,1095.19) 318.07,1130.26 cw(c318.07,1165.33) P1.9@293.27,1140.53 ; P1.9@300.34,1112.92 cw(c342.21,1071.05) 342.21,1130.26 cw(c342.21,1189.47) P1.9@300.34,1147.6 ; 1427.66,1440.89 cw(c1449.78,1418.77) R80.1@1449.78,1450.05 ; 1433.59,1446.81 ccw(c1419.86,1460.55) R80.1@1439.28,1460.55
P_7: P1.7 R81.1 | length 1546.7
  Top Layer w10: P1.7@283,1030.26 346.43,1030.26 552.8,1236.63 552.8,1278.63 613.37,1339.2 939.63,1339.2 940.63,1338.2 974.03,1338.2 1030.63,1394.8 1446.58,1394.8 R81.1@1451.78,1400 ; P1.7@293.27,1019.99 cw(c318.07,995.19) 318.07,1030.26 cw(c318.07,1065.33) P1.7@293.27,1040.53 ; P1.7@300.34,1012.92 cw(c342.21,971.05) 342.21,1030.26 cw(c342.21,1089.47) P1.7@300.34,1047.6 ; 1410.78,1394.8 ccw(c1410.78,1439.45) R81.1@1442.35,1407.88 ; R81.1@1434.92,1394.8 ccw(c1434.92,1415.31) R81.1@1449.43,1400.81
P_9: P1.5 R79.1 | length 1586.4
  Top Layer w10: P1.5@283,930.26 293.26,930.26 354,991 354,1012.65 570.6,1229.25 570.6,1270 622,1321.4 932.25,1321.4 933.25,1320.4 981.4,1320.4 1038,1377 1331,1377 1367.98,1340.02 R79.1@1451.78,1340.02 ; P1.5@283,944.79 ccw(c283,1004.63) 325.31,962.31 ; P1.5@283,954.79 ccw(c283,1038.77) 342.39,979.39 ; P1.5@307.53,930.26 cw(c341.97,930.26) 317.62,954.62 ; 1423.59,1340.02 ccw(c1423.59,1366.55) R79.1@1442.35,1347.79 ; 1425.27,1340.02 cw(c1425.27,1315.85) R79.1@1442.35,1332.94
P_11: C27.2 J6.4 P1.11 U11.4 U11.5 U12.2 | length 2966.8
  Top Layer w8: v1@639.99,1903.01 ccw(c603.75,1939.25) 655,1939.25 ; v1@645.65,1897.35 ccw(c623.07,1919.93) 655,1919.93 ; v1(646,1897) 650,1897 655,1902 655,2258 J6.4@726.2,2329.2 ; 699.04,2302.04 ccw(c661.82,2339.25) J6.4@714.45,2339.25 ; 712.69,2315.69 ccw(c689.14,2339.25) J6.4@722.45,2339.25 ; v1@801,1742.5 cw(c801,1721.98) 815.51,1736.49 cw(c830.02,1751) v1@809.5,1751 ; v1(801,1751) 850.83,1701.17 904,1701.17 928.75,1701.17 U11.4@930.61,1703.04 ; 881.48,1701.17 ccw(c881.48,1724.52) v1@897.99,1708.01 ; 885.48,1701.17 cw(c885.48,1683.48) v1@897.99,1695.99 ; v1@910.01,1695.99 cw(c922.52,1683.48) 922.52,1701.17 ; v1@910.01,1708.01 ccw(c926.52,1724.52) U11.4@926.52,1701.17 ; 923.88,1701.17 ccw(c923.88,1709.77) U11.4@929.96,1703.69
  Top Layer w12: P1.11@283,1230.26 387.78,1230.26 563.92,1406.4 897.6,1406.4 v1(911,1393) ; P1.11@299.64,1213.62 cw(c339.8,1173.46) 339.8,1230.26 cw(c339.8,1287.06) P1.11@299.64,1246.9 ; J6.4@726.2,2329.2 J6.4@726.2,2355 ; v1@900.4,1490.6 ccw(c889.31,1501.69) 905,1501.69 ccw(c920.69,1501.69) v1@909.6,1490.6 ; v1@904,1701.17 v1(904,1702) ; v1@904.5,1393 ccw(c888.81,1393) 899.9,1404.1 ccw(c911,1415.19) v1@911,1399.5 ; v1(905,1486) 905,1554 918,1567 v1(918,1604) 948.49,1604 C27.2@955.98,1596.51 1147.49,1596.51 1192,1552 U12.2@1192,1499.25 ; v1@913.4,1599.4 cw(c902.31,1588.31) 918,1588.31 cw(c933.69,1588.31) 922.6,1599.4 cw(c933.69,1588.31) 933.69,1604 cw(c933.69,1619.69) v1@922.6,1608.6 ; v1@919.79,1604 cw(c919.79,1562.32) C27.2@949.27,1591.79 ; U11.4@930.61,1703.04 944,1703.04 U11.5@950.3,1703.04 ; C27.2@962.7,1589.79 cw(c978.92,1573.57) 978.92,1596.51 cw(c978.92,1619.44) C27.2@962.7,1603.23 ; U12.2@1185.11,1529.77 ccw(c1168.47,1546.41) 1192,1546.41 ccw(c1215.53,1546.41) U12.2@1198.89,1529.77
  Bottom Layer w8: v1(646,1897) 666,1897 ; v1@652.12,1891.1 cw(c666,1877.72) 666,1897 ; v1@652.12,1902.9 ccw(c666,1916.28) 666,1897 ; v1@792.5,1751.22 ccw(c773.7,1751.7) 787,1765 ; v1@800.78,1759.5 cw(c800.3,1778.3) 787,1765 ; v1(801,1751) 787,1765 ; 666,1897 713.67,1849.33 713.67,1823.67 722.67,1814.67 772.37,1765 787,1765
  Bottom Layer w12: v1@900.4,1481.4 cw(c874.82,1455.82) 911,1455.82 ; v1@904,1695.5 cw(c904,1679.81) 915.1,1690.9 cw(c926.19,1702) v1@910.5,1702 ; v1(904,1702) 918,1688 v1(918,1604) ; v1(905,1486) 911,1480 v1(911,1393) ; v1@906.4,1397.6 ccw(c895.31,1408.69) 911,1408.69 ccw(c926.69,1408.69) v1@915.6,1397.6 ; v1@913.4,1608.6 ccw(c902.31,1619.69) 918,1619.69 ccw(c933.69,1619.69) v1@922.6,1608.6
P_13: J6.3 P1.13 R65.2 U11.6 U12.5 | length 3528.8
  Top Layer w8: P1.13@283,1330.26 440.26,1330.26 550,1440 983,1440 991,1448 994,1448 v1(995,1449) ; P1.13@295.39,1317.87 cw(c325.32,1287.94) 325.32,1330.26 cw(c325.32,1372.57) P1.13@295.39,1342.65 ; P1.13@301.05,1312.21 cw(c344.63,1268.63) 344.63,1330.26 cw(c344.63,1391.89) P1.13@301.05,1348.31 ; v1@662.99,1852.01 ccw(c644.13,1870.87) 670.8,1870.87 ; v1@670.8,1847.8 670.8,2239.8 775.41,2344.41 J6.3@775.41,2355 ; 670.8,1862.18 ccw(c685.18,1862.18) v1@675.01,1852.01 ; v1(729,1774) 737,1782 848,1782 890.16,1739.84 894,1736 899.41,1730.59 960.41,1730.59 969.98,1721.02 U11.6@969.98,1703.04 974.04,1703.04 989,1718 ; v1@729.35,1773.65 cw(c749.52,1753.48) 749.52,1782 ; v1@735.01,1767.99 cw(c768.83,1734.17) 768.83,1782 ; 746.55,2315.55 cw(c775.41,2286.68) J6.3@775.41,2327.5 ; 759.01,2328.01 ccw(c747.76,2339.25) J6.3@763.66,2339.25 ; 760.2,2329.2 cw(c775.41,2314) J6.3@775.41,2335.5 ; 952.75,1440 ccw(c952.75,1491.25) v1@988.99,1455.01 ; 963.36,1727.64 cw(c949.58,1713.87) U11.6@969.06,1713.87 ; 972.07,1440 ccw(c972.07,1471.93) v1@994.65,1449.35 ; 977.61,1706.61 cw(c1001.83,1682.39) v1@1004.95,1716.5 ; 980.5,1709.5 cw(c990.57,1699.44) v1@999.6,1710.43 ; 986.74,1715.74 cw(c996.19,1706.28) v1@1004.68,1716.61 ; 989.68,1718.68 cw(c1003.86,1704.5) v1@1005.68,1724.47 ; v1@997.54,1712.93 ccw(c989,1708.28) 989,1718 ; v1@998.47,1722.44 cw(c989,1730.31) 989,1718 ; v1@1011.01,1710.99 cw(c1027.93,1694.07) 1027.93,1718 ; v1@1011.01,1723.01 ccw(c1023.11,1735.11) 1023.11,1718 ; 1145.28,1724.02 cw(c1192,1677.3) U12.5@1192,1743.38 ; 1158.93,1737.68 cw(c1192,1704.61) U12.5@1192,1751.38 ; 1172.59,1751.34 cw(c1192,1731.93) U12.5@1192,1759.38 ; U12.5@1183.69,1738.82 cw(c1163.64,1718.76) 1192,1718.76 cw(c1220.36,1718.76) U12.5@1200.31,1738.82 ; U12.5@1186.25,1764.99 cw(c1192,1759.24) U12.5@1192,1767.38 ; 1406.53,1754 ccw(c1406.53,1802.25) R65.2@1440.65,1768.13 ; 1425.84,1754 ccw(c1425.84,1782.93) R65.2@1446.3,1762.47 ; R65.2@1450.78,1760 1444.78,1754 1367,1754 1318,1705 1202,1705 1192,1715 U12.5@1192,1770.75 1139.25,1718 989,1718
  Bottom Layer w8: v1@669,1837.5 cw(c669,1816.98) 683.51,1831.49 cw(c698.02,1846) v1@677.5,1846 ; v1(669,1846) v1@729,1786 ; 706,1809 cw(c671.01,1774) v1@720.5,1774 ; 719.66,1795.34 cw(c698.32,1774) v1@728.5,1774 ; v1(995,1449) 996,1449 1009,1462 ; v1@995.96,1457.45 ccw(c997.76,1473.24) 1009,1462 ; v1@998.99,1710.99 cw(c974.82,1686.82) 1009,1686.82 ; v1@1003.5,1449 cw(c1021.61,1449) 1008.8,1461.8 ; v1(1005,1717) 1009,1713 1009,1628 ; 1009,1694 1009,1628 ; 1009,1462 1009,1628